# Altium PCB 校正Z軸電路.PcbDoc
Units mm, origin at the board's own origin, x right, y up, seen from the top; angles counter-clockwise.
Board outline 152.4 x 101.6 mm, 2 copper layers (Top Layer, Bottom Layer); 14 components, 18 nets, 99 pads, 6 vias.
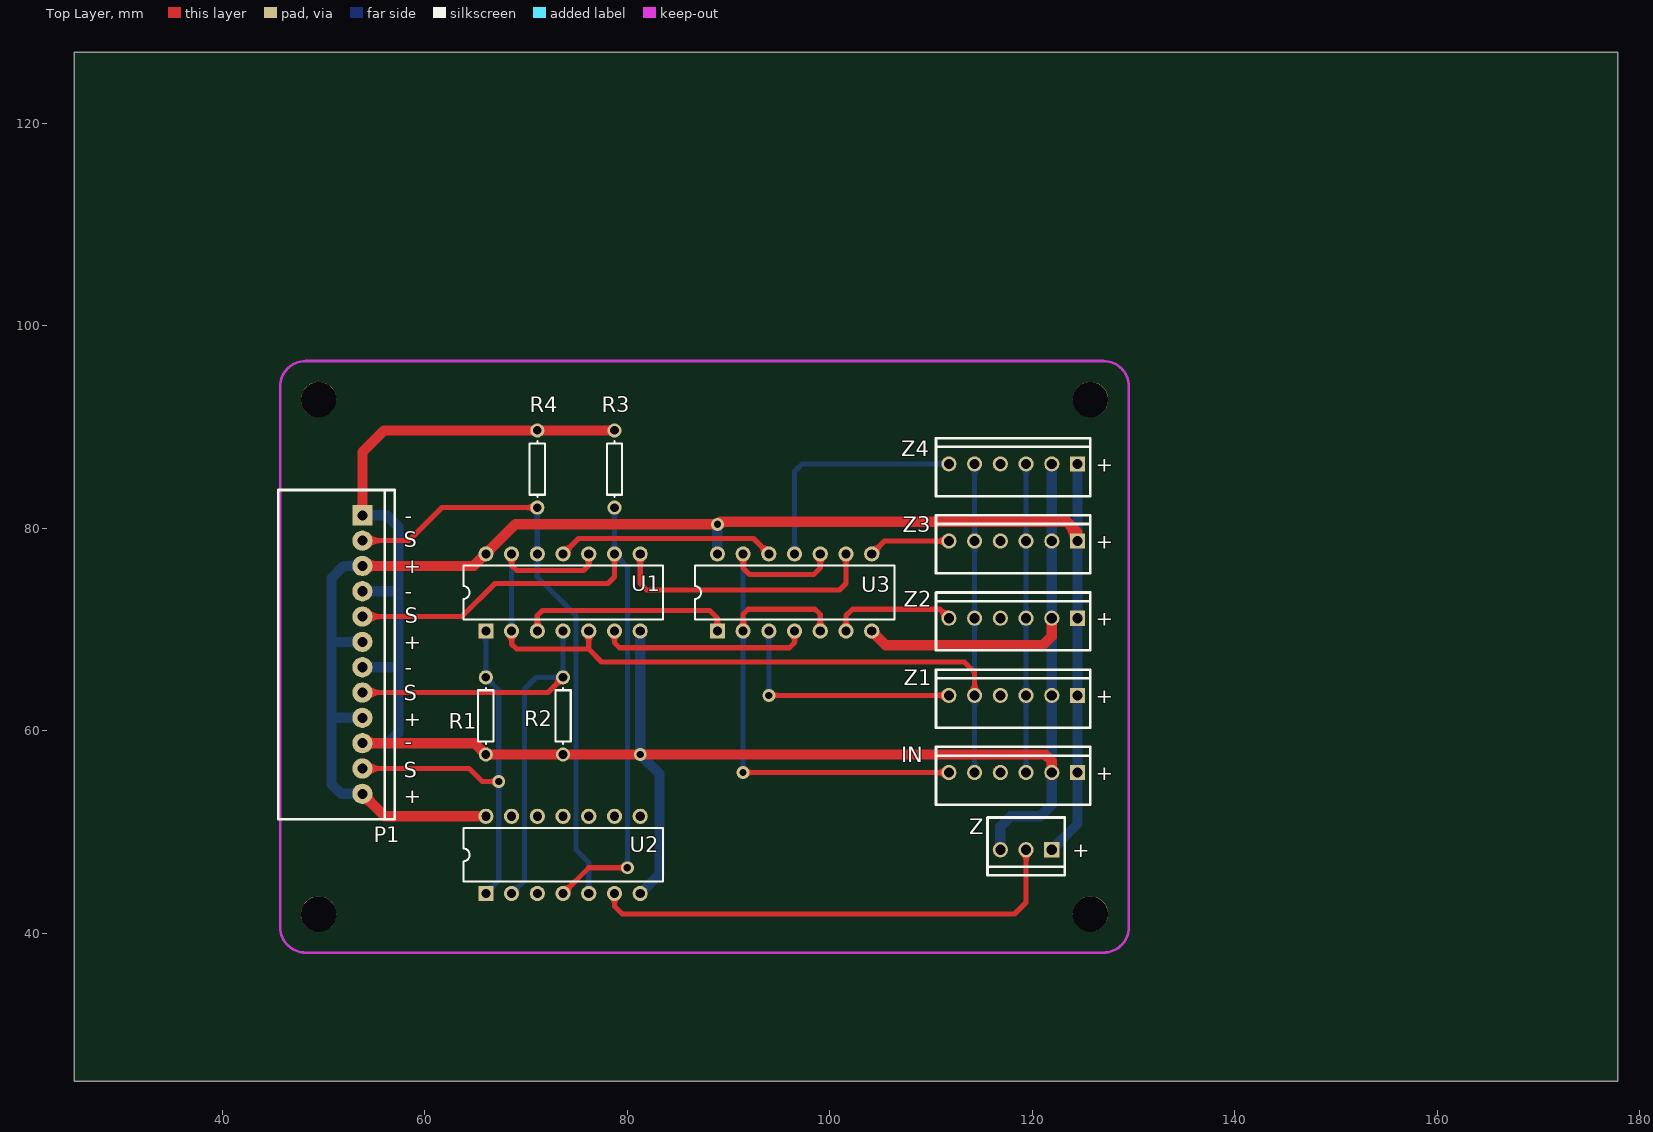
[diagram p0: Top Layer view]
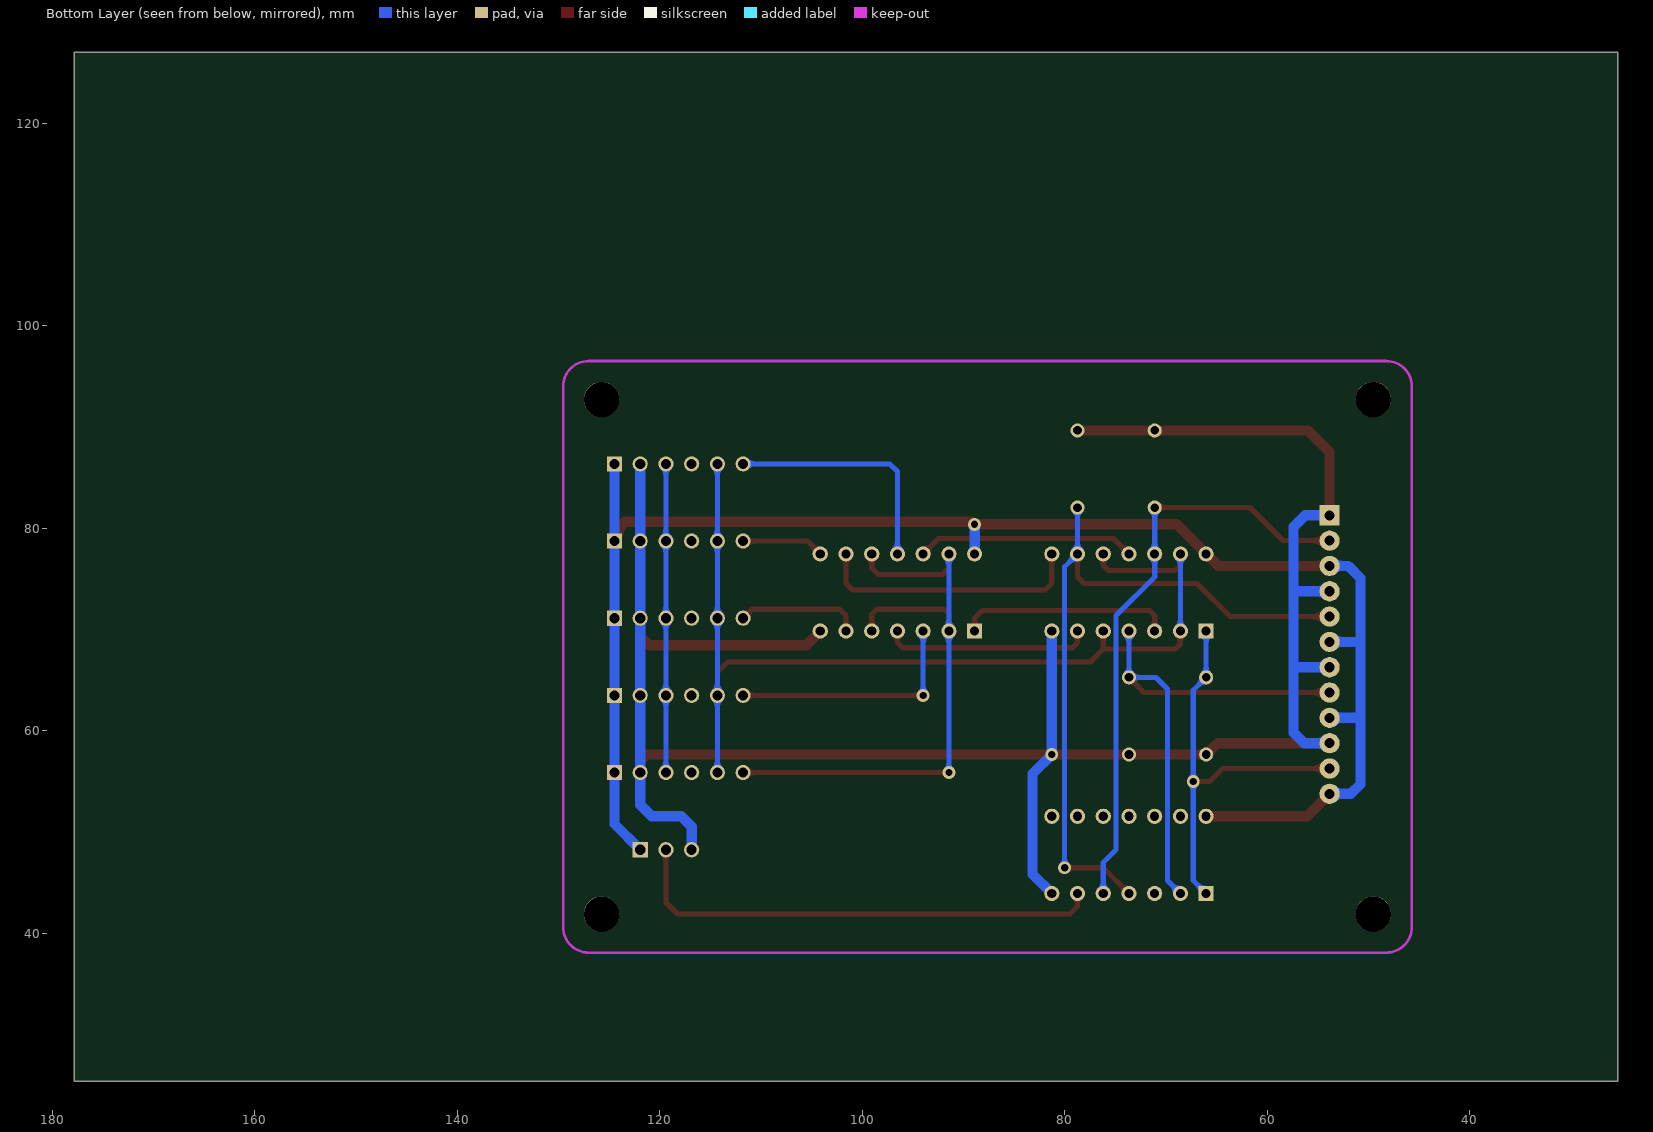
[diagram p1: Bottom Layer view, seen from below]

## Layer stack, top to bottom
Top Layer: signal copper 0.0356
Dielectric: dielectric 0.32, FR-4, Dk 4.8
Bottom Layer: signal copper 0.0356

## Board outline
25.4,25.4 177.8,25.4 177.8,127 25.4,127

## Design rules (kind name [scope] priority, off if disabled: settings)
Clearance [All] p1: gap=0.254
ComponentClearance [All] p1: gap=0.254 collisioncheckmode=0
HoleSize [All] p1: absolutevalues=TRUE maxlimit=3.81 minlimit=0.025 maxpercent=80.000 minpercent=20.000
PolygonConnect [All] p1: connectstyle=Relief reliefconductorwidth=0.254 reliefentries=4 polygonreliefangle="90 Angle"
RoutingVias [All] p1: holewidth=0.711 width=1.27 viastyle="Through Hole" minholewidth=0.711 minwidth=1.27 maxholewidth=0.711 maxwidth=1.27
SolderMaskExpansion [All] p1: expansion=0.102
TestPointUsage [All] p1: valid=0 allowmultiple=FALSE
Testpoint [All] p1: side=15 testpointundercomponent=TRUE minsize=1.016 maxsize=2.54 preferedsize=1.524 minholesize=0 maxholesize=1.016 preferedholesize=0.813 testpointgrid=0.025 style=1023 order=-539222988
Width power [InNetClass('power')] p1: maxlimit=1.016 minlimit=0.254 preferedwidth=1.016
Width [All] p2: maxlimit=1.016 minlimit=0.254 preferedwidth=0.508
16 further rules are at their usual default settings.

## Components (designator, comment, footprint, x,y, rotation, side; value= is the part's Value field where it differs from the comment)
IN "Header 6" "2.54mm 6pin" 111.76,55.88 r0 top
P1 "Header 12" "2.5mm 12pin" 53.848,81.28 r270 top
R1 "Res1" AXIAL-0.3 66.04,61.468 r90 top
R2 "Res1" AXIAL-0.3 73.66,61.468 r90 top
R3 "Res1" AXIAL-0.3 78.74,85.852 r270 top
R4 "Res1" AXIAL-0.3 71.12,85.852 r270 top
U1 "SN74F00N" N014 73.66,73.66 r0 top
U2 "SN74HC20N" N014 73.66,47.752 r0 top
U3 "SN74F08N" N014 96.52,73.66 r0 top
Z "Header 3" "2.54mm 3pin" 121.92,48.26 r180 top
Z1 "Header 6" "2.54mm 6pin" 111.76,63.5 r0 top
Z2 "Header 6" "2.54mm 6pin" 111.76,71.12 r0 top
Z3 "Header 6" "2.54mm 6pin" 111.76,78.74 r0 top
Z4 "Header 6" "2.54mm 6pin" 111.76,86.36 r0 top

## Footprints (in the part's own frame and the unit in brackets; to place one, negate y for a bottom-side part, rotate by r counter-clockwise, add the part's x,y. Pads: shape width x height; smd on the part's side, far side on the other; paste and mask are expansions set on the pad)
"2.5mm 12pin" [mm]
  rect 2x2 hole 1: 1(0,0)
  round 2 hole 1: 2(2.5,0) 3(5,0) 4(7.5,0) 5(10,0) 6(12.5,0) 7(15,0) 8(17.5,0) 9(20,0) 10(22.5,0) 11(25,0) 12(27.5,0)
  silkscreen extent -2.5,-8.3 30,3.2
"2.54mm 3pin" [mm]
  rect 1.5x1.5 hole 1: 1(0,0)
  round 1.5 hole 1: 2(2.54,0) 3(5.08,0)
  silkscreen extent -1.27,-3.18 6.35,2.54
"2.54mm 6pin" [mm]
  rect 1.5x1.5 hole 1: 1(12.7,0)
  round 1.5 hole 1: 2(10.16,0) 3(7.62,0) 4(5.08,0) 5(2.54,0) 6(0,0)
  silkscreen extent -1.27,-3.18 13.97,2.54
AXIAL-0.3 [mm] "Resistor; 2 Leads"
  round 1.4 hole 0.85: 1(-3.81,0) 2(3.81,0)
  silkscreen extent -2.77,-0.76 2.77,0.76
N014 [mm] "DIP; 14 Leads; Row Spacing 7.62 mm; Pitch 2.54 mm"
  rect 1.5x1.5 hole 0.9: 1(-7.62,-3.81)
  round 1.5 hole 0.9: 2(-5.08,-3.81) 3(-2.54,-3.81) 4(0,-3.81) 5(2.54,-3.81) 6(5.08,-3.81) 7(7.62,-3.81) 8(7.62,3.81) 9(5.08,3.81) 10(2.54,3.81) 11(0,3.81) 12(-2.54,3.81) 13(-5.08,3.81) 14(-7.62,3.81)
  silkscreen extent -9.85,-2.65 9.85,2.65

## Part data
P1: "Header, 12-Pin"
R1 R2 R3 R4: "Resistor"
U1: library part 74F08PC, "Quad 2-Input AND Gate"
U2: library part SN74HC21N, "Dual 4-Input Positive-AND Gate"
U3: "Quadruple 2-Input Positive-AND Gate"
Z: "Header, 3-Pin"

## Free pads (board coordinates)
  round 3.5 hole 3.5: 0(49.53,92.71) 1(49.53,41.91) 2(125.73,41.91) 3(125.73,92.71)

## Via types
v1: diameter 1.27, hole 0.711, Top Layer to Bottom Layer, 6 vias

## Nets (pads, with @x,y where several pads share a name; then routed paths per layer and width w, separated by ;. In a path a pad name is that pad's centre, name@x,y a point inside that pad or via, vN(x,y) a via of type N, cw(c..) or ccw(c..) an arc to the next point about the centre after c; other vN are vias at no path point)
CLK: IN.6 U3.2 U3.5 U3.10 U3.13 | length 82.1
  Top Layer w0.508: U3.2@91.089,70.201 ccw(c90.243,71.047) 91.44,71.047 ccw(c92.637,71.047) U3.2@91.791,70.201 ; U3.13@91.089,77.119 cw(c90.243,76.273) 91.44,76.273 cw(c92.637,76.273) U3.13@91.791,77.119 ; v1(91.44,55.88) IN.6 ; U3.2 91.44,71.501 91.948,72.009 98.552,72.009 99.06,71.501 U3.5 ; U3.13 91.44,76.073 92.075,75.438 98.425,75.438 99.06,76.073 U3.10 ; v1@91.709,55.611 cw(c92.36,54.96) 92.36,55.88 cw(c92.36,56.8) v1@91.709,56.149 ; U3.5@98.709,70.201 ccw(c97.863,71.047) 99.06,71.047 ccw(c100.257,71.047) U3.5@99.411,70.201 ; U3.10@98.709,77.119 cw(c97.863,76.273) 99.06,76.273 cw(c100.257,76.273) U3.10@99.411,77.119 ; IN.6@111.409,55.529 ccw(c110.563,54.683) 110.563,55.88 ccw(c110.563,57.077) IN.6@111.409,56.231
  Bottom Layer w0.508: U3.2@91.089,69.499 cw(c90.243,68.653) 91.44,68.653 cw(c92.637,68.653) U3.2@91.791,69.499 ; U3.2@91.089,70.201 ccw(c90.243,71.047) 91.44,71.047 ccw(c92.637,71.047) U3.2@91.791,70.201 ; U3.13@91.089,77.119 cw(c90.243,76.273) 91.44,76.273 cw(c92.637,76.273) U3.13@91.791,77.119 ; v1@91.171,56.149 ccw(c90.52,56.8) 91.44,56.8 ccw(c92.36,56.8) v1@91.709,56.149 ; v1(91.44,55.88) U3.13
CLK1: U3.3 Z1.6 | length 30.8
  Top Layer w0.508: v1(93.98,63.5) Z1.6 ; v1@94.249,63.231 cw(c94.9,62.58) 94.9,63.5 cw(c94.9,64.42) v1@94.249,63.769 ; Z1.6@111.409,63.149 ccw(c110.563,62.303) 110.563,63.5 ccw(c110.563,64.697) Z1.6@111.409,63.851
  Bottom Layer w0.508: U3.3@93.629,69.499 cw(c92.783,68.653) 93.98,68.653 cw(c95.177,68.653) U3.3@94.331,69.499 ; v1@93.711,63.769 ccw(c93.06,64.42) 93.98,64.42 ccw(c94.9,64.42) v1@94.249,63.769 ; v1(93.98,63.5) U3.3
CLK2: U3.6 Z2.6 | length 16.1
  Top Layer w0.508: U3.6@101.249,70.201 ccw(c100.403,71.047) 101.6,71.047 ccw(c102.797,71.047) U3.6@101.951,70.201 ; U3.6 101.6,71.374 102.235,72.009 110.871,72.009 Z2.6 ; Z2.6@111.264,71.12 ccw(c110.067,71.12) 110.913,71.967 ccw(c111.76,72.813) Z2.6@111.76,71.616
CLK3: U3.8 Z3.6 | length 11.9
  Top Layer w0.508: U3.8 105.41,78.74 Z3.6 ; U3.8@104.14,77.966 ccw(c104.14,79.163) 104.987,78.317 ccw(c105.833,77.47) U3.8@104.636,77.47 ; Z3.6@111.409,78.389 ccw(c110.563,77.543) 110.563,78.74 ccw(c110.563,79.937) Z3.6@111.409,79.091
CLK4: U3.11 Z4.6 | length 27.4
  Bottom Layer w0.508: U3.11@96.169,77.821 ccw(c95.323,78.667) 96.52,78.667 ccw(c97.717,78.667) U3.11@96.871,77.821 ; U3.11 96.52,85.598 97.282,86.36 Z4.6 ; Z4.6@111.409,86.009 ccw(c110.563,85.163) 110.563,86.36 ccw(c110.563,87.557) Z4.6@111.409,86.711
CW: IN.5 U1.2 U1.5 U1.10 U1.13 Z1.5 Z2.5 Z3.5 Z4.5 | length 128.6
  Top Layer w0.508: U1.2@68.229,69.499 cw(c67.383,68.653) 68.58,68.653 cw(c69.777,68.653) U1.2@68.931,69.499 ; U1.13@68.241,77.108 cw(c67.511,76.327) 68.58,76.327 ; U1.2 68.58,68.58 69.088,68.072 76.2,68.072 ; U1.13 68.58,76.327 ; U1.13@68.919,77.108 ccw(c69.649,76.327) 68.58,76.327 ; U1.5@75.849,69.499 cw(c75.003,68.653) 76.2,68.653 cw(c77.397,68.653) U1.5@76.551,69.499 ; U1.10@75.861,77.108 cw(c75.131,76.327) 76.2,76.327 ; U1.5 76.2,68.072 ; U1.10 76.2,76.327 ; U1.10@76.539,77.108 ccw(c77.269,76.327) 76.2,76.327 ; Z1.5@113.949,63.851 ccw(c113.103,64.697) 114.3,64.697 ccw(c115.497,64.697) Z1.5@114.651,63.851 ; Z1.5 114.3,65.786 113.284,66.802 77.47,66.802 76.2,68.072 ; 68.58,76.327 69.088,75.819 75.692,75.819 76.2,76.327
  Bottom Layer w0.508: U1.2@68.229,70.201 ccw(c67.383,71.047) 68.58,71.047 ccw(c69.777,71.047) U1.2@68.931,70.201 ; U1.13@68.229,77.119 cw(c67.383,76.273) 68.58,76.273 cw(c69.777,76.273) U1.13@68.931,77.119 ; U1.2 U1.13 ; IN.5@113.949,56.231 ccw(c113.103,57.077) 114.3,57.077 ccw(c115.497,57.077) IN.5@114.651,56.231 ; Z1.5@113.949,63.149 cw(c113.103,62.303) 114.3,62.303 cw(c115.497,62.303) Z1.5@114.651,63.149 ; Z1.5@113.949,63.851 ccw(c113.103,64.697) 114.3,64.697 ccw(c115.497,64.697) Z1.5@114.651,63.851 ; Z2.5@113.949,70.769 cw(c113.103,69.923) 114.3,69.923 cw(c115.497,69.923) Z2.5@114.651,70.769 ; Z2.5@113.949,71.471 ccw(c113.103,72.317) 114.3,72.317 ccw(c115.497,72.317) Z2.5@114.651,71.471 ; Z3.5@113.949,78.389 cw(c113.103,77.543) 114.3,77.543 cw(c115.497,77.543) Z3.5@114.651,78.389 ; Z3.5@113.949,79.091 ccw(c113.103,79.937) 114.3,79.937 ccw(c115.497,79.937) Z3.5@114.651,79.091 ; Z4.5@113.949,86.009 cw(c113.103,85.163) 114.3,85.163 cw(c115.497,85.163) Z4.5@114.651,86.009 ; IN.5 Z4.5
EN: IN.3 Z1.3 Z2.3 Z3.3 Z4.3 | length 45.5
  Bottom Layer w0.508: IN.3@119.029,56.231 ccw(c118.183,57.077) 119.38,57.077 ccw(c120.577,57.077) IN.3@119.731,56.231 ; Z1.3@119.029,63.149 cw(c118.183,62.303) 119.38,62.303 cw(c120.577,62.303) Z1.3@119.731,63.149 ; Z1.3@119.029,63.851 ccw(c118.183,64.697) 119.38,64.697 ccw(c120.577,64.697) Z1.3@119.731,63.851 ; Z2.3@119.029,70.769 cw(c118.183,69.923) 119.38,69.923 cw(c120.577,69.923) Z2.3@119.731,70.769 ; Z2.3@119.029,71.471 ccw(c118.183,72.317) 119.38,72.317 ccw(c120.577,72.317) Z2.3@119.731,71.471 ; Z3.3@119.029,78.389 cw(c118.183,77.543) 119.38,77.543 cw(c120.577,77.543) Z3.3@119.731,78.389 ; Z3.3@119.029,79.091 ccw(c118.183,79.937) 119.38,79.937 ccw(c120.577,79.937) Z3.3@119.731,79.091 ; Z4.3@119.029,86.009 cw(c118.183,85.163) 119.38,85.163 cw(c120.577,85.163) Z4.3@119.731,86.009 ; IN.3 Z4.3
GND: IN.2 P1.1 P1.4 P1.7 P1.10 R1.1 R2.1 R3.1 R4.1 U1.7 U2.7 U3.7 Z1.2 Z2.2 Z3.2 Z4.2 Z.3 | length 238.5
  Top Layer w1.016: P1.1@53.5,81.628 ccw(c52.66,82.468) 53.848,82.468 ccw(c55.036,82.468) P1.1@54.196,81.628 ; P1.10 64.918,58.78 R1.1 121.285,57.658 121.92,57.023 IN.2 ; P1.1 53.848,87.503 56.007,89.662 R3.1 ; P1.10@54.196,58.432 cw(c55.036,57.592) 55.036,58.78 cw(c55.036,59.968) P1.10@54.196,59.128 ; U3.7 105.537,68.453 121.031,68.453 121.92,69.342 Z2.2
  Bottom Layer w1.016: P1.10 56.367,58.78 57.404,59.817 57.404,80.137 56.261,81.28 P1.1 ; P1.7 57.39,66.28 ; P1.4 57.397,73.78 ; P1.10@54.196,58.432 cw(c55.036,57.592) 55.036,58.78 cw(c55.036,59.968) P1.10@54.196,59.128 ; P1.7@54.196,65.932 cw(c55.036,65.092) 55.036,66.28 cw(c55.036,67.468) P1.7@54.196,66.628 ; P1.4@54.196,73.432 cw(c55.036,72.592) 55.036,73.78 cw(c55.036,74.968) P1.4@54.196,74.128 ; P1.1@54.196,80.932 cw(c55.036,80.092) 55.036,81.28 cw(c55.036,82.468) P1.1@54.196,81.628 ; U2.7 83.185,45.847 83.185,55.753 v1(81.28,57.658) U1.7 ; Z.3 116.84,50.546 117.856,51.562 120.777,51.562 121.92,52.705 Z4.2
NetU1_3: U1.3 U3.1 | length 24.9
  Top Layer w0.508: U1.3@70.769,70.201 ccw(c69.923,71.047) 71.12,71.047 ccw(c72.317,71.047) U1.3@71.471,70.201 ; U1.3 71.12,71.374 71.628,71.882 88.138,71.882 88.9,71.12 U3.1 ; U3.1@88.549,70.201 ccw(c87.703,71.047) 88.9,71.047 ccw(c90.097,71.047) U3.1@89.251,70.201
NetU1_6: U1.6 U3.4 | length 24
  Top Layer w0.508: U1.6@78.401,69.488 cw(c77.671,68.707) 78.74,68.707 ; U1.6 78.74,68.707 ; U1.6@79.079,69.488 ccw(c79.809,68.707) 78.74,68.707 ; U3.4@96.181,69.488 cw(c95.451,68.707) 96.52,68.707 ; U3.4 96.52,68.707 ; U3.4@96.859,69.488 ccw(c97.589,68.707) 96.52,68.707 ; 78.74,68.707 79.248,68.199 96.012,68.199 96.52,68.707
NetU1_8: U1.8 U3.9 | length 30.4
  Top Layer w0.508: U1.8@80.929,77.119 cw(c80.083,76.273) 81.28,76.273 cw(c82.477,76.273) U1.8@81.631,77.119 ; U1.8 81.28,74.549 81.915,73.914 100.965,73.914 101.6,74.549 U3.9 ; U3.9@101.249,77.119 cw(c100.403,76.273) 101.6,76.273 cw(c102.797,76.273) U3.9@101.951,77.119
NetU1_11: U1.11 U3.12 | length 25.3
  Top Layer w0.508: U1.11 75.184,78.994 92.456,78.994 U3.12 ; U1.11@73.66,77.966 ccw(c73.66,79.163) 74.507,78.317 ccw(c75.353,77.47) U1.11@74.156,77.47 ; U3.12@93.484,77.47 ccw(c92.287,77.47) 93.133,78.317 ccw(c93.98,79.163) U3.12@93.98,77.966
NetU2_6: U2.6 Z.2 | length 51.7
  Top Layer w0.508: U2.6@78.389,43.591 cw(c77.543,42.745) 78.74,42.745 cw(c79.937,42.745) U2.6@79.091,43.591 ; U2.6 78.74,42.672 79.502,41.91 118.237,41.91 119.38,43.053 Z.2 ; Z.2@119.029,47.909 cw(c118.183,47.063) 119.38,47.063 cw(c120.577,47.063) Z.2@119.731,47.909
SW1: P1.11 R1.2 U1.1 U2.1 | length 55.3
  Top Layer w0.508: P1.11 64.389,56.28 65.678,54.991 v1(67.31,54.991) ; P1.11@54.376,55.752 cw(c55.649,54.479) 55.649,56.28 cw(c55.649,58.081) P1.11@54.376,56.808 ; v1@67.041,54.722 ccw(c66.39,54.071) 66.39,54.991 ccw(c66.39,55.911) v1@67.041,55.26
  Bottom Layer w0.508: U1.1@65.689,69.499 cw(c64.843,68.653) 66.04,68.653 cw(c67.237,68.653) U1.1@66.391,69.499 ; R1.2@65.725,65.593 ccw(c64.963,66.355) 66.04,66.355 ccw(c67.117,66.355) R1.2@66.355,65.593 ; U2.1 67.31,45.212 67.31,64.008 R1.2 U1.1 ; U2.1@66.04,44.438 ccw(c66.04,45.635) 66.887,44.789 ccw(c67.733,43.942) U2.1@66.536,43.942 ; R1.2@66.04,64.832 cw(c66.04,63.755) 66.801,64.517 cw(c67.563,65.278) R1.2@66.486,65.278 ; v1@67.041,54.722 cw(c66.39,54.071) 67.31,54.071 cw(c68.23,54.071) v1@67.579,54.722 ; v1@67.041,55.26 ccw(c66.39,55.911) 67.31,55.911 ccw(c68.23,55.911) v1@67.579,55.26
SW2: P1.8 R2.2 U1.4 U2.2 | length 61.7
  Top Layer w0.508: P1.8 72.162,63.78 R2.2 ; P1.8@54.376,63.252 cw(c55.649,61.979) 55.649,63.78 cw(c55.649,65.581) P1.8@54.376,64.308 ; R2.2@73.214,65.278 cw(c72.137,65.278) 72.899,64.517 cw(c73.66,63.755) R2.2@73.66,64.832
  Bottom Layer w0.508: U2.2 69.85,45.212 69.85,64.135 70.993,65.278 R2.2 U1.4 ; U2.2@68.58,44.438 ccw(c68.58,45.635) 69.427,44.789 ccw(c70.273,43.942) U2.2@69.076,43.942 ; U1.4@73.309,69.499 cw(c72.463,68.653) 73.66,68.653 cw(c74.857,68.653) U1.4@74.011,69.499 ; R2.2@73.345,64.963 ccw(c72.583,64.201) 72.583,65.278 ccw(c72.583,66.355) 73.345,65.593 ccw(c72.583,66.355) 73.66,66.355 ccw(c74.737,66.355) R2.2@73.975,65.593
SW3: P1.5 R3.2 U1.9 U2.4 | length 87.2
  Top Layer w0.508: P1.5 63.66,71.28 66.929,74.549 78.105,74.549 78.74,75.184 U1.9 ; P1.5@54.376,70.752 cw(c55.649,69.479) 55.649,71.28 cw(c55.649,73.081) P1.5@54.376,71.808 ; U2.4 76.2,46.482 v1(80.01,46.482) ; U2.4@73.66,44.438 ccw(c73.66,45.635) 74.507,44.789 ccw(c75.353,43.942) U2.4@74.156,43.942 ; U1.9@78.389,77.119 cw(c77.543,76.273) 78.74,76.273 cw(c79.937,76.273) U1.9@79.091,77.119 ; v1@79.741,46.213 ccw(c79.09,45.562) 79.09,46.482 ccw(c79.09,47.402) v1@79.741,46.751
  Bottom Layer w0.508: U1.9@78.389,77.821 ccw(c77.543,78.667) 78.74,78.667 ccw(c79.937,78.667) U1.9@79.091,77.821 ; R3.2@78.425,81.727 cw(c77.663,80.965) 78.74,80.965 cw(c79.817,80.965) R3.2@79.055,81.727 ; U1.9@78.74,76.974 cw(c78.74,75.777) 79.587,76.623 cw(c80.433,77.47) U1.9@79.236,77.47 ; R3.2 U1.9 80.01,76.2 v1(80.01,46.482) ; v1@79.741,46.751 ccw(c79.09,47.402) 80.01,47.402 ccw(c80.93,47.402) v1@80.279,46.751
SW4: P1.2 R4.2 U1.12 U2.5 | length 70.7
  Top Layer w0.508: P1.2 58.46,78.78 61.722,82.042 R4.2 ; P1.2@54.376,78.252 cw(c55.649,76.979) 55.649,78.78 cw(c55.649,80.581) P1.2@54.376,79.308 ; R4.2@70.805,81.727 ccw(c70.043,80.965) 70.043,82.042 ccw(c70.043,83.119) R4.2@70.805,82.357
  Bottom Layer w0.508: U1.12@70.769,77.119 cw(c69.923,76.273) 71.12,76.273 cw(c72.317,76.273) U1.12@71.471,77.119 ; U1.12@70.769,77.821 ccw(c69.923,78.667) 71.12,78.667 ccw(c72.317,78.667) U1.12@71.471,77.821 ; R4.2@70.805,81.727 cw(c70.043,80.965) 71.12,80.965 cw(c72.197,80.965) R4.2@71.435,81.727 ; R4.2 71.12,75.184 74.93,71.374 74.93,48.26 76.2,46.99 U2.5 ; U2.5@75.849,44.293 ccw(c75.003,45.139) 76.2,45.139 ccw(c77.397,45.139) U2.5@76.551,44.293
VCC: IN.1 P1.3 P1.6 P1.9 P1.12 U1.14 U2.14 U3.14 Z1.1 Z2.1 Z3.1 Z4.1 Z.1 | length 176.5
  Top Layer w1.016: P1.12@53.848,53.288 cw(c53.848,52.1) 54.688,52.94 cw(c55.528,53.78) P1.12@54.34,53.78 ; P1.12 56.066,51.562 U2.14 ; P1.3 64.85,76.28 68.961,80.391 v1(88.9,80.391) 89.154,80.645 123.444,80.645 124.46,79.629 Z3.1 ; P1.3@54.196,75.932 cw(c55.036,75.092) 55.036,76.28 cw(c55.036,77.468) P1.3@54.196,76.628 ; v1@88.99,80.301 cw(c89.82,79.471) 89.82,80.645 ; 123.418,80.671 cw(c121.488,78.74) Z3.1@124.218,78.74
  Bottom Layer w1.016: 50.854,68.78 P1.6 ; 50.866,61.28 P1.9 ; P1.12@53.5,53.432 ccw(c52.66,52.592) 52.66,53.78 ccw(c52.66,54.968) P1.12@53.5,54.128 ; P1.9@53.5,60.932 ccw(c52.66,60.092) 52.66,61.28 ccw(c52.66,62.468) P1.9@53.5,61.628 ; P1.6@53.5,68.432 ccw(c52.66,67.592) 52.66,68.78 ccw(c52.66,69.968) P1.6@53.5,69.128 ; P1.3@53.5,75.932 ccw(c52.66,75.092) 52.66,76.28 ccw(c52.66,77.468) P1.3@53.5,76.628 ; P1.12 51.757,53.78 50.8,54.737 50.8,75.057 52.023,76.28 P1.3 ; U3.14 v1(88.9,80.391) ; Z.1 124.46,50.8 Z4.1
pads on no net: IN.4 U2.3 U2.8 U2.9 U2.10 U2.11 U2.12 U2.13 Z1.4 Z2.4 Z3.4 Z4.4

## Keep-outs
Keep-Out Layer:
  lines w0.254: 45.72,40.64 ccw(c48.26,40.64) 48.26,38.1 127,38.1 ccw(c127,40.64) 129.54,40.64 129.54,93.98 ccw(c127,93.98) 127,96.52 48.26,96.52 ccw(c48.26,93.98) 45.72,93.98 45.72,40.64

## Silkscreen, mask and mechanical layers (free items; w line width, h text height)
Top Overlay:
  text "+" at 126.238,85.598 h1.5
  text "-" at 58.039,80.518 h1.5
  text "S" at 57.912,78.105 h1.5
  text "+" at 126.238,77.978 h1.5
  text "+" at 57.912,75.565 h1.5
  text "-" at 58.039,73.025 h1.5
  text "S" at 58.039,70.612 h1.5
  text "+" at 126.238,70.358 h1.5
  text "+" at 57.912,68.072 h1.5
  text "-" at 58.039,65.532 h1.5
  text "S" at 57.912,62.992 h1.5
  text "+" at 126.238,62.738 h1.5
  text "+" at 57.912,60.452 h1.5
  text "-" at 58.039,58.166 h1.5
  text "S" at 57.912,55.372 h1.5
  text "+" at 126.238,55.118 h1.5
  text "+" at 57.912,52.832 h1.5
  text "+" at 123.952,47.498 h1.5